# Altium PCB ECEN4730_BRD1A_2021-08-29.PcbDoc
Units mil, origin at the board's own origin, x right, y up, seen from the top; angles counter-clockwise.
Board outline 3500 x 1999.99 mil, 2 copper layers (Top Layer, Bottom Layer), stack 61.756 mil thick; 22 components, 12 nets, 57 pads, 13 vias.
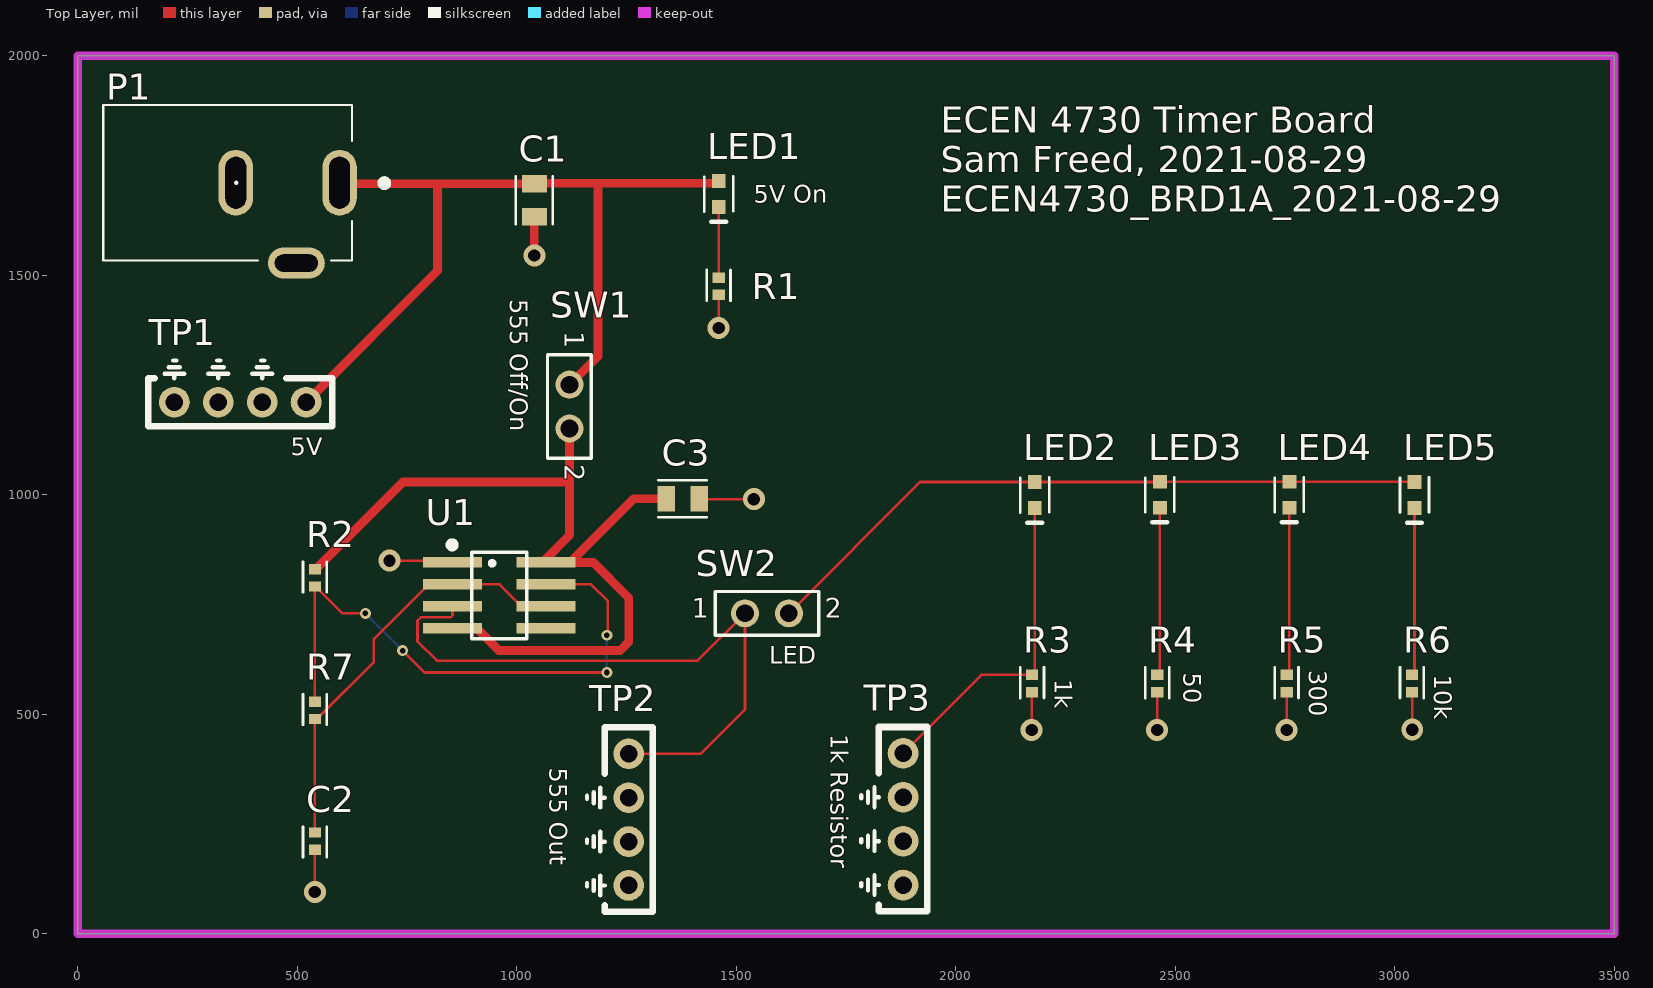
[diagram p0: Top Layer view]
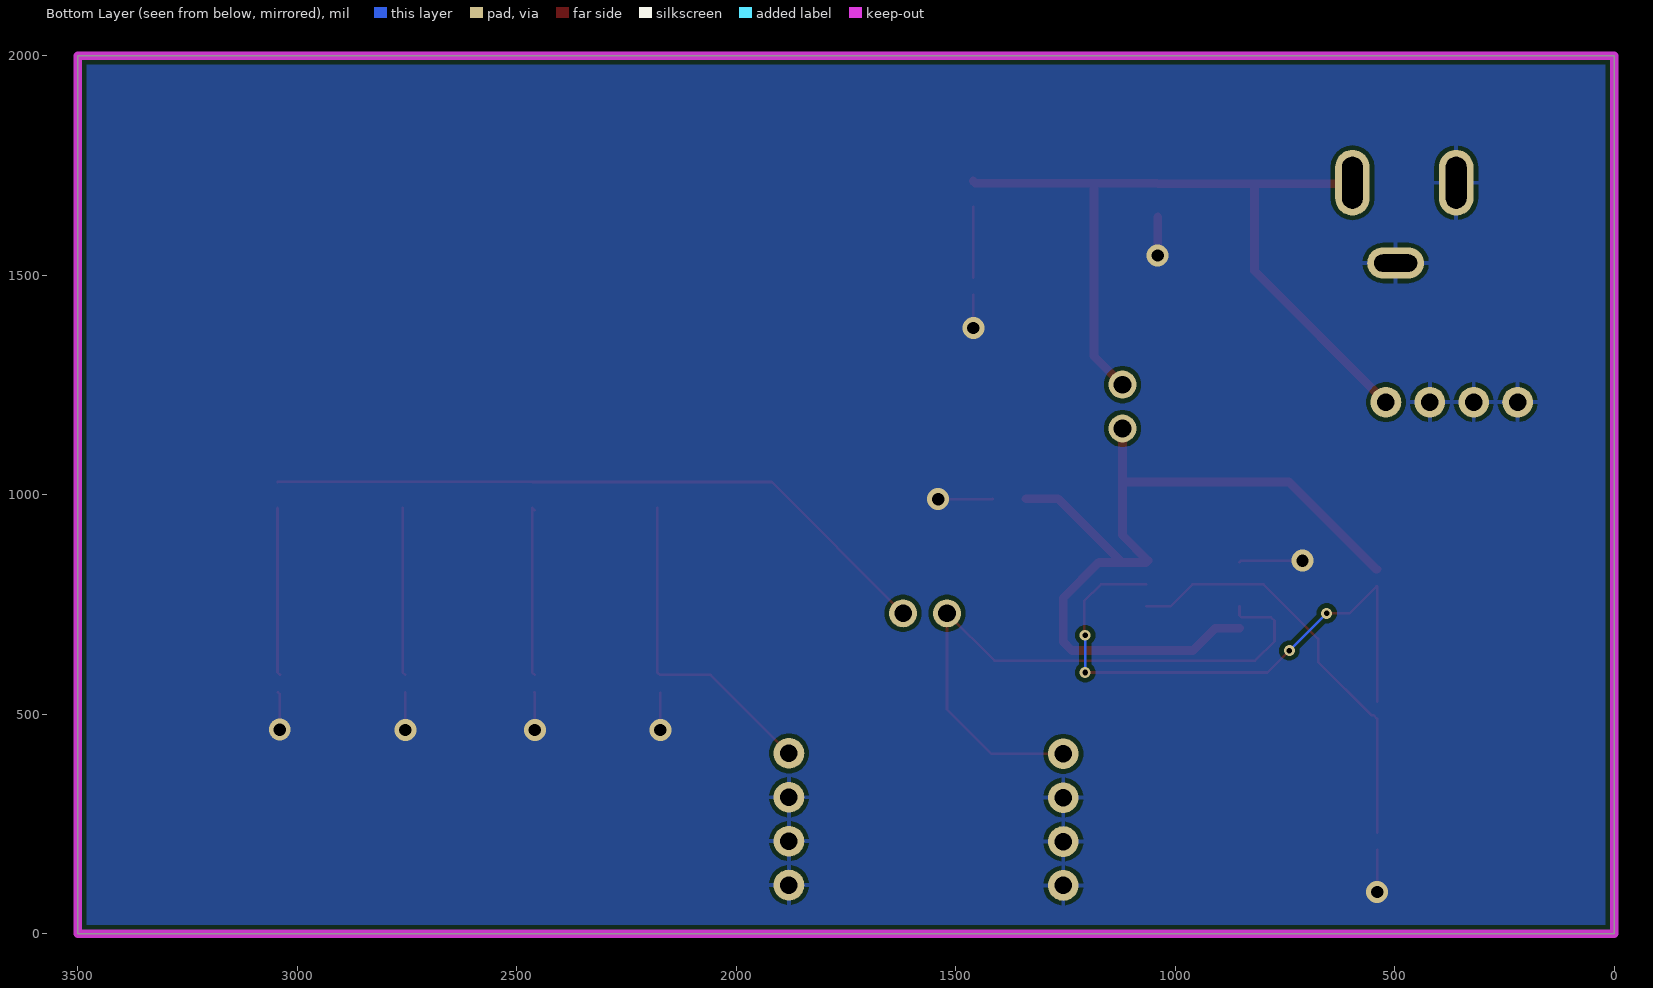
[diagram p1: Bottom Layer view, seen from below]
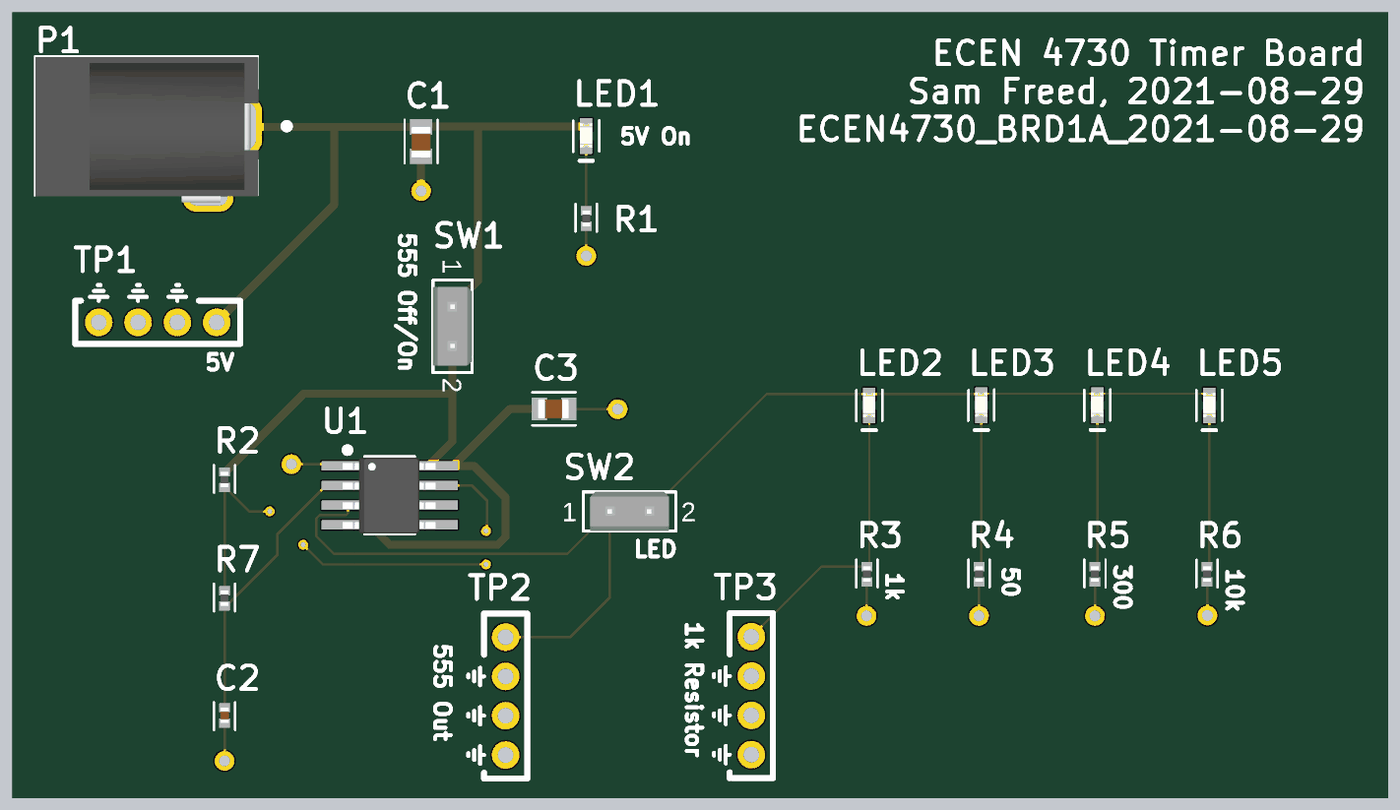
[diagram p2: 3D render of the assembled board from above, using the file's embedded part models]

## Layer stack, top to bottom
Top Solder: solder mask 1, SM-001, Dk 4
Top Layer: signal copper 1.378
Dielectric 1: core 59, Core-043, Dk 4.3
Bottom Layer: signal copper 1.378
Bottom Solder: solder mask 1, SM-001, Dk 4

## Board outline
0,0.01 3500,0.01 3500,2000 0,2000

## Design rules (kind name [scope] priority, off if disabled: settings)
BoardOutlineClearance [All] p1: gap=10 ignorepadtopadclearanceinfootprint=FALSE except(0: Arc-SplitContinuation Track-SplitContinuation SMDPad-SplitContinuation THPad-SplitContinuation Via-SplitContinuation Fill-SplitContinuation Poly-SplitContinuation Region-SplitContinuation Text-SplitContinuation)
Clearance [All] p1: gap=10 ignorepadtopadclearanceinfootprint=FALSE except(0: Arc-Hole Track-Hole SMDPad-Hole THPad-Hole Via-Hole Fill-Hole Poly-Hole Region-Hole Text-Hole)
PlaneClearance [All] p1: clearance=10
PlaneConnect [All] p1: planeconnectstyle=Direct reliefexpansion=20 reliefentries=4 reliefconductorwidth=10 reliefairgap=10
PolygonConnect [All] p1: thpad.connectstyle=Relief thpad.reliefconductorwidth=10 thpad.reliefentries=4 thpad.polygonreliefangle="90 Angle" thpad.airgapwidth=10 smdpad.connectstyle=Direct smdpad.reliefconductorwidth=10 smdpad.reliefentries=4 smdpad.polygonreliefangle="90 Angle" smdpad.airgapwidth=10 via.connectstyle=Direct via.reliefconductorwidth=10 via.reliefentries=4 via.polygonreliefangle="90 Angle" via.airgapwidth=10
RoutingVias [All] p1: holewidth=13 width=25 viastyle="Through Hole" minholewidth=13 minwidth=25 maxholewidth=60 maxwidth=80
SolderMaskExpansion [All] p1: expansion=4 istentingtop=FALSE
UnRoutedNet [All] p1: checkbadconnections=TRUE
Width "Schematic Width Constraint_1" [InNet('+5')] p1: maxlimit=100 minlimit=10 preferedwidth=20 minimp=50.000000 maximp=50.000000 favimp=50.000000
Width "Schematic Width Constraint" [InNet('555_5V')] p2: maxlimit=100 minlimit=10 preferedwidth=20 minimp=50.000000 maximp=50.000000 favimp=50.000000
Width [All] p3: maxlimit=100 minlimit=6 preferedwidth=6 minimp=50.000000 maximp=50.000000 favimp=50.000000
27 further rules are at their usual default settings.

## Components (designator, comment, footprint, x,y, rotation, side; value= is the part's Value field where it differs from the comment)
C1 "22uF" 0805_Passive_Capaciitor 1040,1670.94 r90 top
C2 "1uF" 0402_Passive_Capacitor 540,210.94 r270 top
C3 "22uF" 0805_Passive_Capaciitor 1378,990.94 r0 top
LED1 "KT-0603R" LED_0603 1460,1685 r270 top value=Red
LED2 "KT-0603R" LED_0603 2180,999.53 r270 top value=Green
LED3 "KT-0603R" LED_0603 2465,1000 r270 top value=Green
LED4 "KT-0603R" LED_0603 2760,1000 r270 top value=Green
LED5 "KT-0603R" LED_0603 3045,999.53 r270 top value=Green
P1 "Power Jack" Power_Jack 596.22,1710.94 r180 top value="CONN PWR JACK 2X5.5MM SOLDER"
R1 "1k" 0402_Passive_Resistor 1460,1475 r90 top value="1K Ohm"
R2 "1k" 0402_Passive_Resistor 540,810.63 r90 top value="1K Ohm"
R3 "1k" 0402_Passive_Resistor 2174,570 r90 top value="1K Ohm"
R4 "47 Ohms" 0402_Passive_Resistor 2459,570 r90 top value=47Ohm
R5 "300" 0402_Passive_Resistor 2754,570 r90 top value=300Ohm
R6 "10k" 0402_Passive_Resistor 3039,570 r90 top value=10KOhm
R7 "1k" 0402_Passive_Resistor 540,508.79 r90 top value="1K Ohm"
SW1 "SW_555OffOn" 2Pin-Header-Conn 1120,1250.94 r270 top
SW2 "SW_LEDOffOn" 2Pin-Header-Conn 1520,730 r0 top
TP1 "TP_5V" TP10x_Probe 370,1210.94 r180 top
TP2 "TP_555_Out" TP10x_Probe 1255,260 r270 top
TP3 "TP_LEDCur" TP10x_Probe 1880,260.94 r270 top
U1 "NE555DR" TS555IDTTR 960,770.94 r0 top

## Footprints (in the part's own frame and the unit in brackets; to place one, negate y for a bottom-side part, rotate by r counter-clockwise, add the part's x,y. Pads: shape width x height; smd on the part's side, far side on the other; paste and mask are expansions set on the pad)
2Pin-Header-Conn [mm]
  round 1.62 hole 1.02: 1(0,0) 2(2.54,0)
  silkscreen extent -1.72,-1.27 4.26,1.26, body extent -1.27,-1.27 3.81,1.27, height 8.13
0402_Passive_Capacitor [mm] "Reference: https://www.worthingtonassembly.com/perfect-0402-footprint"
  rect 0.6x0.7 smd mask+0: 1(-0.5,0) 2(0.5,0)
  silkscreen extent -0.84,-0.69 0.94,0.69, body extent -0.5,-0.27 0.5,0.28, height 0.5
0402_Passive_Resistor [mm] "Reference: https://www.worthingtonassembly.com/perfect-0402-footprint"
  rect 0.6x0.7 smd mask+0: 1(-0.5,0) 2(0.5,0)
  silkscreen extent -0.84,-0.69 0.94,0.69, body extent -0.49,-0.25 0.51,0.25, height 0.4
0805_Passive_Capaciitor [mm] "Reference: http://livepartlibrary.com/fpdimensions.html"
  rect 1x1.45 smd mask+0: 1(-0.95,0) 2(0.95,0)
  silkscreen extent -1.4,-1.07 1.4,1.07, body extent -1.04,-0.62 0.96,0.63, height 1.4
LED_0603 [mm]
  rect 0.8x0.8 smd: 1(-0.75,0) 2(0.75,0)
  silkscreen extent -1.02,-0.84 1.6,0.84, body extent -0.84,-0.41 0.76,0.39, height 0.55
Power_Jack [mm]
  oval 2x3.8 hole 1.2 slot 3 at 90 deg: 1(0,0) 2(6,0)
  oval 3.3x1.8 hole 1 slot 2.5 at 0 deg: 3(2.5,4.65)
  silkscreen extent -2.79,-4.5 13.68,4.5, body extent -0.76,-4.45 13.64,4.95, height 11.49
TP10x_Probe [mil] "Small Probs footprint"
  round 70 hole 40: 1(-150,0) 2(-50,0) 2(50,0) 2(150,0)
  silkscreen extent -210,-95 210,55
TS555IDTTR [mm] "IC OSC Single Timer 2.7MHz 8SOIC"
  rect 3.4x0.6 smd: 1(-2.7,1.905) 2(-2.7,0.635) 3(-2.7,-0.635) 4(-2.7,-1.905) 5(2.7,-1.905) 6(2.7,-0.635) 7(2.7,0.635) 8(2.7,1.905)
  silkscreen extent -2.85,-2.5 1.6,3.05, body extent -3.03,-2.48 2.96,2.43, height 1.75

## Part data
C1 C3: library part C_22uF_0805, "MULTILAYER CERAMIC CAPACITORS MLCC - SMD/SMT 22UF 25V 0805 ROHS", LCSC Part#=C45783, MFR Part #=CL21A226MAQNNNE, Datasheet=https://datasheet.lcsc.com/szlcsc/Samsung-Electro-Mechanics-CL21A226MAQNNNE_C45783.pdf, Type=Basic
C2: library part C_1uF_0402, "MULTILAYER CERAMIC CAPACITORS MLCC - SMD/SMT 1UF 25V 0402 ROHS", LCSC Part#=C52923, MFR Part #=CL05A105KA5NQNC, Datasheet=https://datasheet.lcsc.com/szlcsc/Samsung-Electro-Mechanics-CL05A105KA5NQNC_C52923.pdf, Type=Basic
LED1: library part LED_RED_0603, "LIGHT EMITTING DIODES (LED) RED 520~625NM 90~100MCD@20MA TOP VIEW 0603 ROHS", LCSC Part#=C2286, Datasheet=https://datasheet.lcsc.com/szlcsc/Everlight-Elec-19-217-BHC-ZL1M2RY-3T_C72041.pdf, MFR Part #=KT-0603R, Type=Basic
LED2 LED3 LED4 LED5: library part LED_GREEN_0603, "LIGHT EMITTING DIODES (LED) GREEN 520~535NM 112~258MCD@20MA TOP VIEW 0603 ROHS", LCSC Part#=C72043, MFR Part #=19-217/GHC-YR1S2/3T, Type=Basic
P1: library part "P_Power Jack", "Power Barrel Connector Jack 2.10mm ID (0.083\"), 5.50mm OD (0.217\") Through Hole, Right Angle", LCSC Part#=C136744, Digikey Link=https://www.digikey.com/product-detail/en/PJ-102A/CP-102A-ND/275425/?itemSeq=304982367, Digikey Part=CP-102A-ND, Type=Extended
R1 R2 R3 R7: library part R_1K_0402, "1 kOhms chip resistor SURFACE MOUNT 1KOHMS ±1% 1/16W 0402 ROHS", LCSC Part#=C11702, MFR Part #=0402WGF1001TCE, Datasheet=https://datasheet.lcsc.com/szlcsc/Uniroyal-Elec-0402WGF1001TCE_C11702.pdf, Type=Basic
R4: library part R_47Ohm_0402, "CHIP RESISTOR - SURFACE MOUNT 47OHMS ±1% 1/16W 0402 ROHS", LCSC Part#=C25118, MFR Part #=0402WGF470JTCE, Datasheet=https://datasheet.lcsc.com/szlcsc/Uniroyal-Elec-0402WGF470JTCE_C25118.pdf, Type=Basic
R5: library part R_300Ohm_0402, "CHIP RESISTOR - SURFACE MOUNT 300OHMS ±1% 1/16W 0402 ROHS", LCSC Part#=C25102, MFR Part #=0402WGF3000TCE, Datasheet=https://datasheet.lcsc.com/szlcsc/Uniroyal-Elec-0402WGF3000TCE_C25102.pdf, Type=Basic
R6: library part R_10KOhm_0402, "CHIP RESISTOR - SURFACE MOUNT 10KOHMS ±1% 1/16W 0402 ROHS", LCSC Part#=C25744, MFR Part #=0402WGF1002TCE, Datasheet=https://datasheet.lcsc.com/szlcsc/Uniroyal-Elec-0402WGF1002TCE_C25744.pdf, Type=Basic
SW1 SW2: library part SW_2Pin_100mil_Switch, "2Pin Header", LCSC Part#=C124375, Type=Extended
TP1 TP2 TP3: library part TP_10x_Probe, "Test Point 300 mil centers"
U1: library part U_555_Slow, "555 Timer SOIC-8_150MIL ROHS 150ns Rise Time", LCSC Part#=C7593, Digikey Link=https://www.digikey.com/product-detail/en/texas-instruments/NE555DR/296-6501-1-ND/372490, MFR Part #=NE555DR, Type=Basic

## Via types
v1: diameter 50, hole 28, Top Layer to Bottom Layer, 9 vias
v2: diameter 25, hole 13, Top Layer to Bottom Layer, 4 vias

## Nets (pads, with @x,y where several pads share a name; then routed paths per layer and width w, separated by ;. In a path a pad name is that pad's centre, name@x,y a point inside that pad or via, vN(x,y) a via of type N, cw(c..) or ccw(c..) an arc to the next point about the centre after c; other vN are vias at no path point)
555_5V: C3.1 R2.2 SW1.2 U1.4 U1.8 | length 2025.2
  Top Layer w20: R2.2 541.97,830.32 741,1029.35 1120,1029.35 ; U1.4 908.82,695.94 959.76,645 1235,645 1255,665 1255,765 1174.06,845.94 U1.8@1121.42,845.94 ; SW1.2 1120,1029.35 ; C3.1 1266.42,990.94 U1.8@1121.42,845.94 ; 1120,1029.35 1120,907.76 1062.24,850 U1.8 U1.8@1121.42,845.94
555_Out: SW2.1 TP2.1 U1.3 | length 1487.8
  Top Layer w6: U1.3 853.7,725.13 849.32,720.76 781.39,720.76 773.77,713.14 773.77,666.23 818,622 1412,622 SW2.1 1520,510.94 1419.06,410 TP2.1
+5: C1.2 LED1.1 P1.1 SW1.1 TP1.1 | length 1974.6
  Top Layer w20: TP1.1 819.41,1510.35 819.41,1708.35 ; P1.1 598.82,1708.35 819.41,1708.35 ; SW1.1 1185.24,1316.18 1185.24,1709.65 ; LED1.1 1455.12,1709.65 1185.24,1709.65 ; 819.41,1708.35 C1.2 1041.3,1709.65 1185.24,1709.65
GND: C1.1 C2.2 C3.2 P1.2 P1.3 R1.1 R3.1 R4.1 R5.1 R6.1 TP1.2 TP2.2 TP3.2 U1.1 | length 875.8
  Top Layer w6: v1(540,95) C2.2 ; v1(710,850) 849.65,850 U1.1 ; C3.2 1416.35,990 v1(1540,990) ; v1(1460,1380) R1.1 ; v1(2173,464) R3.1@2173,549.32 ; v1(2459,464) 2459,549.32 R4.1@2460,550.32 ; v1(2754,464) R5.1 ; v1(3040,465) 3040,546.32 R6.1@3044,550.32
  Top Layer w20: v1(1040,1545) C1.1
NetC2_1: C2.1 R7.1 U1.2 U1.6 | length 963.5
  Top Layer w6: C2.1 R7.1 548.81,497.91 553.42,497.91 674.47,618.97 674.47,671.83 798.58,795.94 U1.2 961.18,795.94 1011.18,745.94 U1.6
NetLED1_2: LED1.2 R1.2 | length 160.8
  Top Layer w6: R1.2 LED1.2
NetLED2_1: LED2.1 LED3.1 LED4.1 LED5.1 SW2.2 | length 1549.3
  Top Layer w6: SW2.2 1919.06,1029.06 LED2.1 2464.53,1029.06 LED3.1 LED4.1 3044.53,1029.53 LED5.1
NetLED2_2: LED2.2 R3.2 TP3.1 | length 750.8
  Top Layer w6: TP3.1 2058.74,589.69 R3.2 2180,595.69 LED2.2
NetLED3_2: LED3.2 R4.2 | length 391.8
  Top Layer w6: R4.2 2465,595.69 LED3.2 LED3.2@2459,964.47
NetLED4_2: LED4.2 R5.2 | length 383.3
  Top Layer w6: R5.2 2760,595.69 LED4.2
NetLED5_2: LED5.2 R6.2 | length 382.8
  Top Layer w6: R6.2 3045,595.69 LED5.2
NetR2_1: R2.1 R7.2 U1.7 | length 1334.4
  Top Layer w6: R7.2 R2.1 541.97,790.94 602.91,730 v2(655,730) ; v2@736.36,641.36 v2(740,645) 790,595 v2(1205,595) ; U1.7 1169.06,795.94 1207.51,757.49 1207.51,682.51 v2(1205,680)
  Bottom Layer w6: v2(655,730) v2(740,645) ; v2(1205,595) v2(1205,680)
pads on no net: U1.5

## Polygon pours and split planes (outlines as drawn)
GND on Bottom Layer "GND_L02_P000" (solid, pour order 0): 0,2000 3500,2000 3500,0 0,0

## Keep-outs
Keep-Out Layer:
  the board outline again, w20

## Silkscreen, mask and mechanical layers (free items; w line width, h text height)
Top Overlay:
  text "5V On" at 1540,1665 h40
  text "ECEN 4730 Timer Board / Sam Freed, 2021-08-29 / ECEN4730_BRD1A_2021-08-29" at 1965.47,1645 h60
  text "555 Off/On" at 985,1445 h40 r270
  text "5V" at 485,1090 h40
  text "LED" at 1575,615 h40
  text "300" at 2805,600 h40 r270
  text "50" at 2520,595 h40 r270
  text "10k" at 3090,590 h40 r270
  text "1k" at 2225,580 h40 r270
  text "1k Resistor" at 1715,455 h40 r270
  text "555 Out" at 1075,378.25 h40 r270

## Text inside footprints (layer, text, board x,y; h text height)
SW1: Top Overlay "1" at 1095,1372.59 h77.5 r270; Top Overlay "2" at 1095,1069.8 h77.5 r270; Mechanical 16 "1" at 1095,1372.59 h77.5 r270; Mechanical 16 "2" at 1095,1069.8 h77.5 r270
SW2: Top Overlay "2" at 1701.14,705 h77.5; Top Overlay "1" at 1398.35,705 h77.5; Mechanical 16 "2" at 1701.14,705 h77.5; Mechanical 16 "1" at 1398.35,705 h77.5